# Altium PCB PCB.PcbDoc
Units mm, origin at the board's own origin, x right, y up, seen from the top; angles counter-clockwise.
Board outline 61.5 x 43 mm, 2 copper layers (Top Layer, Bottom Layer); 27 components, 14 nets, 73 pads, 112 vias.
Unrouted connection lines stored in the file: 4.
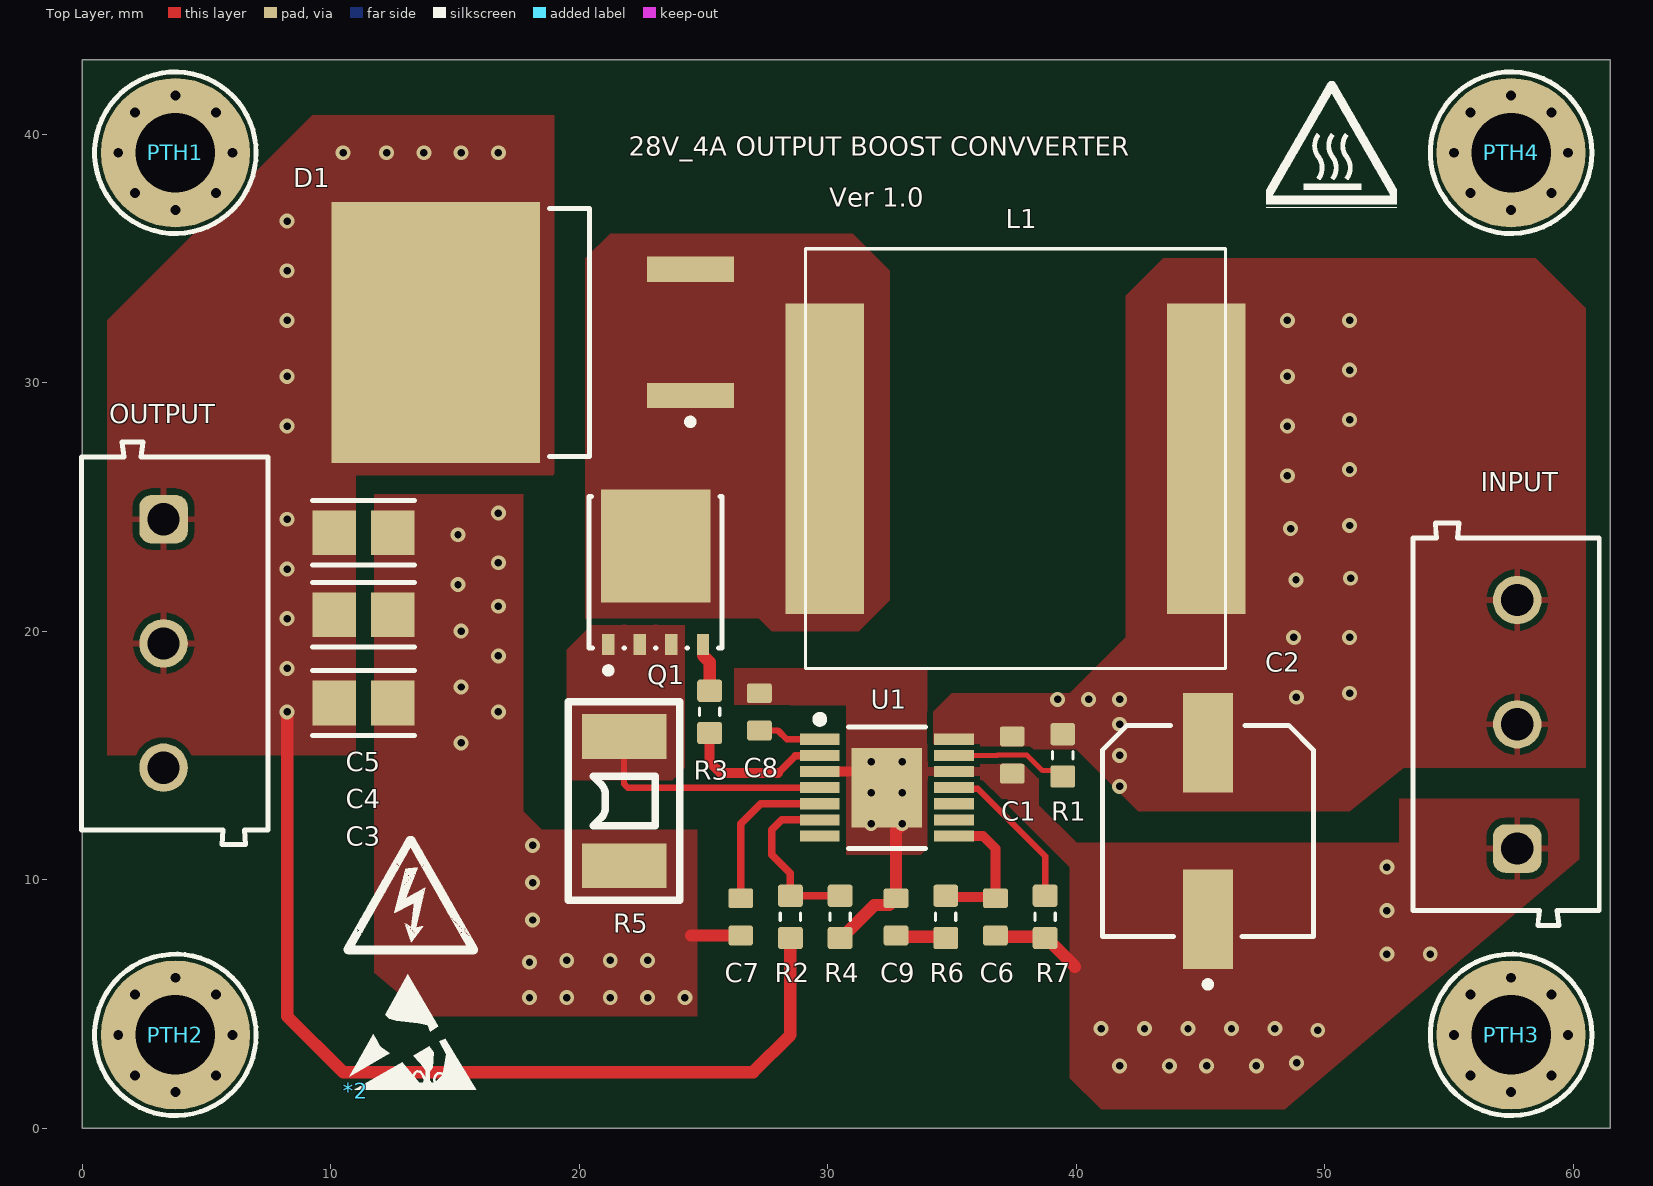
[diagram p0: Top Layer view]
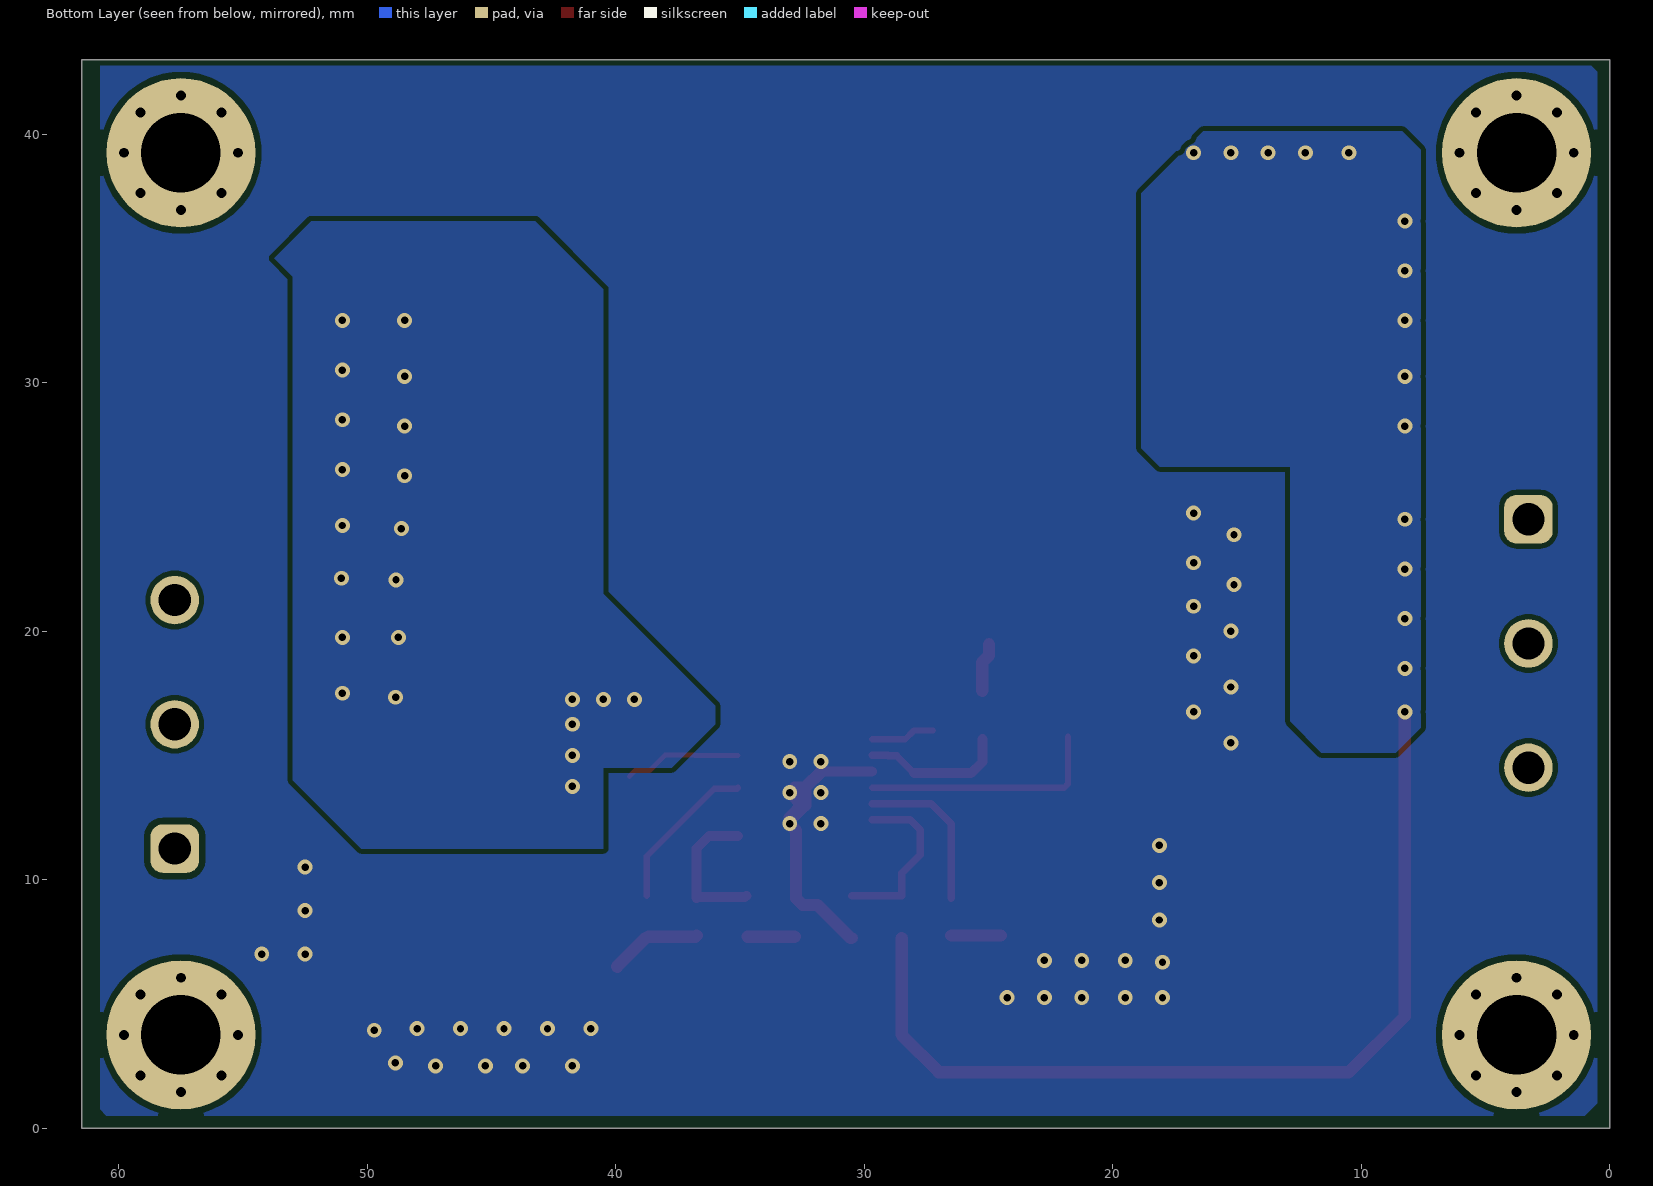
[diagram p1: Bottom Layer view, seen from below]
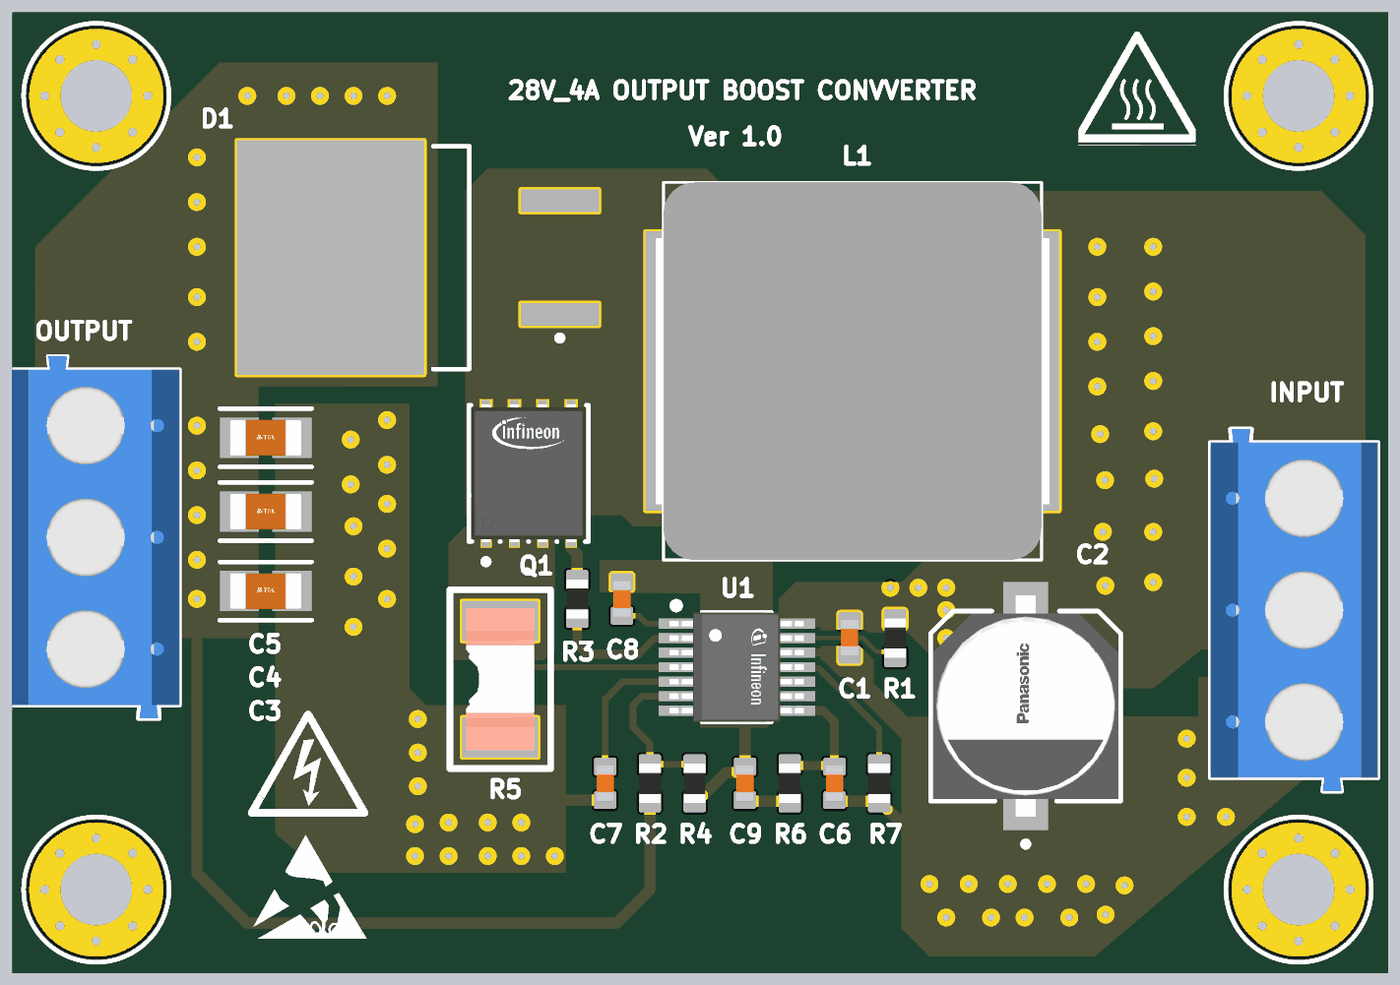
[diagram p2: 3D render of the assembled board from above, using the file's embedded part models]

## Layer stack, top to bottom
Top Solder: solder mask 0.0102, Solder Resist, Dk 3.5
Top Layer: signal copper 0.0356
Dielectric 1: dielectric 0.32, FR-4, Dk 4.8
Bottom Layer: signal copper 0.0356
Bottom Solder: solder mask 0.0102, Solder Resist, Dk 3.5

## Board outline
0,0 0,43 61.5,43 61.5,0

## Design rules (kind name [scope] priority, off if disabled: settings)
Clearance Clearance_1 [All] p1: gap=0.2 ignorepadtopadclearanceinfootprint=FALSE
Clearance [All] p2: gap=0.25 ignorepadtopadclearanceinfootprint=FALSE
PlaneConnect [All] p1: planeconnectstyle=Direct reliefexpansion=0.508 reliefentries=4 reliefconductorwidth=0.254 reliefairgap=0.254
PolygonConnect [All] p1: thpad.connectstyle=Relief thpad.reliefconductorwidth=0.254 thpad.reliefentries=4 thpad.polygonreliefangle="90 Angle" thpad.airgapwidth=0.254 smdpad.connectstyle=Direct smdpad.reliefconductorwidth=0.254 smdpad.reliefentries=4 smdpad.polygonreliefangle="90 Angle" smdpad.airgapwidth=0.254 via.connectstyle=Direct via.reliefconductorwidth=0.254 via.reliefentries=4 via.polygonreliefangle="90 Angle" via.airgapwidth=0.254
RoutingVias [All] p1: holewidth=0.711 width=1.27 viastyle="Through Hole" minholewidth=0.711 minwidth=1.27 maxholewidth=0.711 maxwidth=1.27
SolderMaskExpansion [All] p1: expansion=0.102 istentingtop=FALSE
UnRoutedNet [All] p1: checkbadconnections=TRUE
Width [All] p1: maxlimit=2 minlimit=0.2 preferedwidth=0.5 minimp=50.000000 maximp=50.000000 favimp=50.000000
28 further rules are at their usual default settings.

## Components (designator, comment, footprint, x,y, rotation, side; value= is the part's Value field where it differs from the comment)
*2 "ESD_HAND" ESD_HAND 11,1.5 r0 top (schematic designator *4)
C1 "CC0603KRX7R9BB104" CAP_0603 37.427,15.012 r90 top value=100nF
C2 "EEE-FP1V101AP" FP-FPF-MFG 45.301,11.958 r90 top
C3 "C3216X5R1V226M160AC" FP-C3216-160-0_2-IPC_B 11.326,23.96 r0 top
C4 "C3216X5R1V226M160AC" FP-C3216-160-0_2-IPC_B 11.326,20.658 r0 top
C5 "C3216X5R1V226M160AC" FP-C3216-160-0_2-IPC_B 11.326,17.102 r0 top
C6 "CC0603KRX7R9BB104" CAP_0603 36.75,8.5 r90 top value=100nF
C7 "CC0603KRX7R9BB104" CAP_0603 26.5,8.5 r90 top value=100nF
C8 "CC0603KRX7R9BB104" CAP_0603 27.25,16.75 r270 top value=100nF
C9 "CC0603KRX7R9BB104" CAP_0603 32.75,8.5 r270 top value=100nF
D1 "MBRB2545CTT4G" ONSC-D2PAK-3-418B-04_V 18.123,32.018 r180 top
INPUT "691102710003" 691102710003 57.3,16.25 r90 top
L1 "SRP1770CC-220M" SRP1770TA 37.554,26.938 r180 top value=22uH
OUTPUT "691102710003" 691102710003 3.724,19.504 r270 top
PTH1 "PTH-M2.2" PH3.2 3.75,39.25 r0 top
PTH2 "PTH-M2.2" PH3.2 3.75,3.75 r0 top
PTH3 "PTH-M2.2" PH3.2 57.5,3.75 r0 top
PTH4 "PTH-M2.2" PH3.2 57.5,39.25 r90 top
Q1 "BSC028N06NSTATMA1" FP-PG-TDSON-8-MFG 23.076,22.366 r0 top
R1 "100K" RESC1608N 39.459,15 r90 top
R2 "150K" RESC1608N 28.5,8.5 r270 top value=1%
R3 "8.2R" RESC1608N 25.25,16.75 r270 top
R4 "14.7K" RESC1608N 30.5,8.5 r90 top value=1%
R5 "CMS-R010-1.0" CSS2H-2512 21.806,13.162 r270 top value=12mR
R6 "1M" RESC1608N 34.75,8.5 r90 top
R7 "1M" RESC1608N 38.75,8.5 r90 top
U1 "TLE8386-2EL" SOP65P600X170-15N 32.38,13.7 r0 top

## Footprints (in the part's own frame and the unit in brackets; to place one, negate y for a bottom-side part, rotate by r counter-clockwise, add the part's x,y. Pads: shape width x height; smd on the part's side, far side on the other; paste and mask are expansions set on the pad)
691102710003 [mm] "5,00mm - modular - blue - Horizontal entry with pressure clamp - 9,9 mm height - 03p"
  rrect50% 1.95x1.95 hole 1.3: 1(-5,-0.45)
  round 1.95 hole 1.3: 2(0,-0.45) 3(5,-0.45)
  silkscreen extent -8.1,-3.75 8.1,3.75, body extent -8.1,-3.75 8.1,3.75, height 9.96
CAP_0603 [mm]
  rrect25% 0.8x1 smd: 1(-0.75,0) 2(0.75,0)
  body extent -0.8,-0.4 0.8,0.4, height 0.51
CSS2H-2512 [mm]
  rect 1.8x3.4 smd: 1(-2.6,0) 2(2.6,0)
  silkscreen extent -4,-2.25 4,2.25, body extent -3.17,-1.52 3.18,1.52, height 0.84
ESD_HAND [mm]
  silkscreen extent -0.25,0.04 4.85,4.69
FP-C3216-160-0_2-IPC_B [mm]
  rect 1.754x1.806 smd paste+0 mask+0: 1(-1.176,0) 2(1.176,0)
  silkscreen extent -2.05,-1.3 2.05,1.3, body extent -2.3,-1.15 2.3,1.15, height 0.25
FP-FPF-MFG [mm]
  rect 4x2 smd paste+0 mask+0: 1(-3.55,0) 2(3.55,0)
  silkscreen extent -6.3,-4.25 4.25,4.25, body extent -5.8,-4.5 5.8,4.5, height 0.25
FP-PG-TDSON-8-MFG [mm]
  rect 0.5x0.85 smd paste-1000 mask+0: 1(-1.905,-2.9) 2(-0.635,-2.9) 3(0.635,-2.9) 4(1.905,-2.9)
  rect 4.41x4.55 smd paste-1000 mask-1000: 5-6-7-8(0,1.05)
  silkscreen extent -2.68,-4.07 2.68,3.05, body extent -3,-3.42 3,3.42, height 0.25
ONSC-D2PAK-3-418B-04_V [mm] "DPAK, 3-Leads, Body 9.97x9.145mm, Pitch 2.54mm"
  rect 3.504x1.016 smd: 1(-6.35,2.54) 3(-6.35,-2.54)
  rect 8.38x10.49 smd: 4(3.9,0)
  silkscreen extent -6.48,-4.98 -0.69,4.98, body extent -2.3,-4.98 6.85,4.98, height 4.83
PH3.2 [mm]
  round 6 hole 3.2: 1(0,0)
  silkscreen extent -3.25,-3.25 3.25,3.25
RESC1608N [mm] "Chip Resistor, Body 1.6x0.8mm, 0603, IPC Medium Density"
  round 0.254 on Mech14: 0(0,0)
  rrect25% 0.9x1 smd: 1(-0.85,0) 2(0.85,0)
  silkscreen extent -0.15,-0.41 0.15,0.41, body extent -0.87,-0.47 0.88,0.48, height 0.54
SOP65P600X170-15N [mm] "SOP,0.65mm pitch;14 pin,3.90mm W X 4.90mm L X 1.70mm H body (w/thermal tab)"
  rect 1.6x0.45 smd paste+0 mask+0: 1(-2.7,1.95) 2(-2.7,1.3) 3(-2.7,0.65) 4(-2.7,0) 5(-2.7,-0.65) 6(-2.7,-1.3) 7(-2.7,-1.95) 8(2.7,-1.95) 9(2.7,-1.3) 10(2.7,-0.65) 11(2.7,0) 12(2.7,0.65) 13(2.7,1.3) 14(2.7,1.95)
  rect 2.85x3.2 smd paste-0.555 mask+0: 15(0,0)
  silkscreen extent -2.85,-2.45 1.55,2.9, body extent -3,-2.45 3,2.45, height 1.71
SRP1770TA [mm]
  rect 3.15x12.5 smd: 1(-7.675,0) 2(7.675,0)
  silkscreen extent -8.45,-8.45 8.45,8.45, body extent -8.8,-8.45 8.8,8.45, height 7

## Part data
*2: library part Logo
C1 C6 C7 C8 C9: library part CAP_0603, "0.1 µF ±10% 50V Ceramic Capacitor X7R 0603 (1608 Metric)", LCSC=X7R, manufacturer=YAGEO, Rating=50V, Supplier Part Number 1=1362556, Distributor Link=https://www.digikey.com/en/products/detail/yageo/CC0603KRX7R9BB104/2103082?gclsrc=aw.ds&gad_source=1&gad_campaignid=21513785267&gbraid=0AAAAADrbLljzI6fa-Yv3A_zcN2QMoABTo&gclid=Cj0KCQjw267GBhCSARIsAOjVJ4GgA4ff2FxiLCEbH8-vZcEXf5Wzezs6PVganFd4XNuEUpgWgdMcZi8aAmI2EALw_wcB, Manufacturer Part Number=CC0603KRX7R9BB104, Supplier 1=Farnell
C2: library part CMP-05427-000034-1, "CAP ALUM 100UF 20% 35V SMD", Capacitance=100uF, Case/Package=Radial, Dielectric Material=Aluminium, ESR (Equivalent Series Resistance)=80mR, Leakage Current=35uA, Max Operating Temperature=105°C, Min Operating Temperature=-55°C, Package Quantity=1, Ripple Current=850mA, Tolerance=20%, Voltage=35V, Construction=Cylindrical, Contact Plating=Tin, Diameter=8mm, Height=10.2mm, Height - Seated (Max)=0.402inch, Lead Free="Lead Free", Lead Pitch=3.1mm, Length=10.5mm, Life (Hours)=2000Hour, Material=Aluminium, Mount="Surface Mount", Number of Pins=2, Packaging="Tape and Reel", Radiation Hardening=No, REACH SVHC="No SVHC", Ripple Current (AC)=850mA, RoHS Compliant=Yes, series=FP, Termination=SMD/SMT, Voltage Rating=35V, Voltage Rating (DC)=35V, Width=8.3mm
C3 C4 C5: library part CMP-2000-05398-2, "Multilayer Ceramic Capacitors 22uF ±20% 35V X5R SMD 1206", Capacitance=22uF, Case Code (Metric)=3216, Case Code (Imperial)=1206, Dielectric=X5R, Dielectric Material=Ceramic, Max Operating Temperature=85°C, Min Operating Temperature=-55°C, Package Quantity=2000, Tolerance=20%, Voltage=35V, Case/Package=1206, Construction=Flat, Depth=1.6mm, Height=1.6mm, Lead Free="Lead Free", Length=3.2mm, Mount="Surface Mount", Packaging="Tape and Reel", Radiation Hardening=No, REACH SVHC="No SVHC", Resistor Type=Ceramic, RoHS Compliant=Yes, series=C, Termination=SMD/SMT, Thickness=1.6mm, Voltage Rating=35V, Voltage Rating (DC)=35V, Weight=0.000571oz, Width=0.063inch
D1: library part CMP-1055-00101-1, "SWITCHMODE(TM) Power Rectifier, 3-Pin D2PAK, Pb-Free, Tape and Reel", manufacturer="On Semiconductor", componentlink1description="Manufacturer URL", componentlink1url=http://www.onsemi.com/, componentlink2description=Datasheet, componentlink2url=http://www.onsemi.cn/pub_link/Collateral/MBRB2545CT-D.PDF, ComponentLink3Description="Package Specification", ComponentLink3URL=http://www.onsemi.com/pub_link/Collateral/418B-04.PDF, Configuration="Common Cathode", DatasheetVersion="Rev. 12", Mounting Technology="Surface Mount", PackageDescription="3-Pin Flange Mount, Body 9.145 x 9.97 mm, Pitch 2.54 mm", PackageReference=D2PAK-3-418B-04, PackageVersion="Rev. K, 09/2008", Packing="Tape and Reel", PartNumber=MBRB2545CTT4G, RoHS=TRUE, IFSM Max (A)=150
INPUT OUTPUT: library part CMP-1502-03259-3, "102 Series 5MM Pitch Straight, Pcb Terminal Block, Through Hole, 3 Way", Color=Blue, Current=15A, Max Operating Temperature=105°C, Min Operating Temperature=-40°C, Voltage=300V, Contact Material=Brass, Contact Plating=Tin, Current Rating=15A, Height=13.4mm, Housing Material=Nylon, Lead Pitch=5mm, Length=7.5mm, Mount="Through Hole", Number of Contacts=3, Number of Levels=1, Number of Pins=3, Number of Positions Per Level=3, Packaging=Box, Pitch=5.0038mm, Plating=Steel, RoHS=Compliant, Stripping Length=-6mm, Termination=Screw, Voltage Rating=300V, Width=16.2mm, Wire Gauge (Max)=22AWG, Wire Gauge (Min)=14AWG, Wire/Cable Gauge=22AWG
L1: library part SRP1770TA-1R0M, "1 ÂµH Shielded Drum Core, Wirewound Inductor 52 A 2mOhm Max Nonstandard", Package="NONSTANDARD-2 BOURNS", Availability="In Stock", Check_prices=https://www.snapeda.com/parts/SRP1770TA-1R0M/Bourns/view-part/?ref=eda, MF=Bourns, MP=SRP1770TA-1R0M, PRICE=None, Purchase-URL=https://pricing.snapeda.com/search?q=SRP1770TA-1R0M&ref=eda, SnapEDA_Link=https://www.snapeda.com/parts/SRP1770TA-1R0M/Bourns/view-part/?ref=snap
PTH1 PTH2 PTH3 PTH4: library part PTH_S1
Q1: library part CMP-32901-000649-1, "MOSFET N-CH 60V 24A/100A TDSON", Continuous Drain Current (ID)=100A, Drain to Source Voltage (Vdss)=60V, Max Operating Temperature=175°C, Max Power Dissipation=100W, Min Operating Temperature=-55°C, Input Capacitance=3.375nF, Mount="Surface Mount", Number of Pins=8, Packaging="Tape and Reel", Rds On Max=2.8mR, RoHS Compliant=Yes
R1 R2 R3 R4 R6 R7: library part RES_2A, "0.1W, 1/10W Chip Resistor 0603 (1608 Metric)"
R5: library part CSS2H-2512, "RES.SHUNT (6432) 2512 10m Ohms 1% 2.5W AUTO SMT", manufacturer=ISABELLENHÜTTE, componentlink1description="Product link Vender", componentlink1url=https://www.ozdisan.com/p/hassas-ve-sont-direncler-195/isabellenhutte-cms-r010-1-0-536275, Manufacturer Part Number=CMS-R010-1.0, Rate=4W
U1: "Basic Smart Boost Controller", manufacturer="Infineon Technologies", ManufacturerPartNumber=TLE8386-2EL, PackageReference=PG-SSOP-14-3

## Via types
v1: diameter 0.6, hole 0.3, Top Layer to Bottom Layer, 80 vias
v2: diameter 1, hole 0.4, Top Layer to Bottom Layer, 32 vias

## Nets (pads, with @x,y where several pads share a name; then routed paths per layer and width w, separated by ;. In a path a pad name is that pad's centre, name@x,y a point inside that pad or via, vN(x,y) a via of type N, cw(c..) or ccw(c..) an arc to the next point about the centre after c; other vN are vias at no path point)
FB: R2.1 R4.2 U1.6 | length 7.1
  Top Layer w0.3: U1.6 28.15,12.4 27.75,12 27.75,11 28.5,10.25 R2.1 R4.2
GND: C1.1 C2.1 C3.2 C4.2 C5.2 C6.1 C7.1 C8.1 C9.1 INPUT.1 PTH1.1 PTH2.1 PTH3.1 PTH4.1 R4.1 R5.2 R7.1 U1.3 U1.12 U1.15 | length 18.8
  Top Layer w0.4: U1.3 U1.15@31.73,14.35
  Top Layer w0.5: 24.5,7.75 C7.1 ; R4.1 30.55,7.65 31.877,8.977 32.477,8.977 C9.1 32.75,11.973 32.981,12.204 32.967,12.217 v1(33,12.25) ; U1.15@31.73,14.35 U1.15 ; C6.1 36.8,7.7 38.7,7.7 R7.1 38.8,7.65 39.95,6.5 ; U1.15 32.38,13 33,12.38 v1(33,12.25) ; U1.15 32.8,13.7 v1(33,13.5) 32.5,13 33,12.5 v1(33,12.25)
  other v1: 41.75,2.5 43.75,2.5 45.25,2.5 47.25,2.5 48.873,2.627 49.72,3.936 41,4 42.75,4 44.5,4 46.25,4 48,4 18,5.25 19.5,5.25 21.25,5.25 22.75,5.25 24.25,5.25 18,6.674 19.5,6.75 21.25,6.75 22.75,6.75 52.5,7 54.25,7 18.127,8.373 52.5,8.75 18.127,9.877 52.5,10.5 18.123,11.377 31.75,12.25 31.75,13.5 31.75,14.75 33,14.75 15.25,15.5 16.75,16.75 15.25,17.75 16.75,19 15.25,20 16.75,21 15.123,21.873 16.75,22.75 15.123,23.877 16.75,24.75
  other v2: 3.75,1.45 57.5,1.45 2.124,2.124 5.376,2.124 55.874,2.124 59.126,2.124 1.45,3.75 6.05,3.75 55.2,3.75 59.8,3.75 2.124,5.376 5.376,5.376 55.874,5.376 59.126,5.376 3.75,6.05 57.5,6.05 3.75,36.95 57.5,36.95 2.124,37.624 5.376,37.624 55.874,37.624 59.126,37.624 1.45,39.25 6.05,39.25 55.2,39.25 59.8,39.25 2.124,40.876 5.376,40.876 55.874,40.876 59.126,40.876 3.75,41.55 57.5,41.55
NetC1_2: C1.2 C2.2 INPUT.2 INPUT.3 L1.1 R1.2 U1.14
  other v1: 41.75,13.75 41.75,15 41.75,16.25 39.25,17.25 40.5,17.25 41.75,17.25 48.861,17.339 51,17.5 48.75,19.75 51,19.75 48.847,22.063 51.047,22.127 48.627,24.123 51,24.25 48.5,26.25 51,26.5 48.5,28.25 51,28.504 48.5,30.25 51,30.5 48.5,32.5 51,32.5
NetC3_1: C3.1 C4.1 C5.1 D1.4 OUTPUT.1 OUTPUT.2 R2.2 | length 38
  Top Layer w0.5: v1(8.25,16.75) 8.25,4.5 10.5,2.25 27,2.25 28.5,3.75 R2.2
  other v1: 8.25,18.5 8.25,20.5 8.25,22.496 8.25,24.5 8.25,28.25 8.25,30.25 8.25,32.5 8.25,34.5 8.25,36.5 10.5,39.25 12.25,39.25 13.75,39.25 15.25,39.25 16.75,39.25
NetC6_2: C6.2 R6.2 U1.8 | length 5.9
  Top Layer w0.4: R6.2 34.8,9.3 36.7,9.3 C6.2 36.75,11.25 36.25,11.75 U1.8
NetC7_2: C7.2 U1.5 | length 6.5
  Top Layer w0.3: C7.2 26.5,12.25 27.3,13.05 U1.5
NetC8_2: C8.2 U1.1 | length 2.6
  Top Layer w0.254: C8.2 28,16 28.35,15.65 U1.1
NetC9_2: C9.2 R6.1 | length 2
  Top Layer w0.254: C9.2 C9.2@32.8,7.7 ; R6.1@34.7,7.7 R6.1
  Top Layer w0.5: C9.2@32.8,7.7 R6.1@34.7,7.7
NetD1_1: D1.1 D1.3 L1.2 Q1.5-6-7-8
NetQ1_1: Q1.1 Q1.2 Q1.3 R5.1 U1.4 | length 9.8
  Top Layer w0.254: R5.1 21.806,13.849 21.955,13.7 U1.4
NetQ1_4: Q1.4 R3.1 | length 2
  Top Layer w0.5: Q1.4 24.981,19.019 25.25,18.75 R3.1
NetR1_1: R1.1 U1.13 | length 4.7
  Top Layer w0.2: U1.13 36.829,15 36.841,15.012 38.013,15.012 38.638,14.388 39.221,14.388 R1.1
NetR3_2: R3.2 U1.2 | length 5.8
  Top Layer w0.3: 28,14.281 28.694,14.975 29.03,14.975 29.055,15 U1.2
  Top Layer w0.4: R3.2@25.25,15.65 25.25,14.734 25.703,14.281 28,14.281
NetR7_2: R7.2 U1.11 | length 6.4
  Top Layer w0.254: U1.11 35.124,13.656 36.038,13.656 38.75,10.944 R7.2
pads on no net: OUTPUT.3 R1.0 R2.0 R3.0 R4.0 R6.0 R7.0 U1.7 U1.9 U1.10

## Polygon pours and split planes (outlines as drawn)
NetC1_2 on Top Layer "NONET_L01_P-001" (solid, pour order 3): 34.25,15.25 36.25,15.25 40,15.25 42.5,12.75 51,12.75 53.187,14.5 60.5,14.5 60.5,33 58.5,35 43.5,35 42,33.5 42,19.75 39.75,17.5 35,17.5 34.25,16.75
GND on Top Layer "NONET_L01_P-001" (solid, pour order 9): 30.75,16.5 30.75,16.992 26.25,17.042 26.25,18.5 34,18.5 34,16.25 34,14.75 38.25,14.75 38.5,14.5 38.5,13 40.016,11.484 53,11.5 53,13 53,13.25 60.25,13.25 60.25,12.513 60.25,10.818 48.384,0.75 41,0.75 39.75,2 39.75,10.5 37.25,13 37.25,13.25 37,13.25 36.25,14 34,14 34,11.25 33.75,11 30.75,11 30.75,11.75
GND on Top Layer "NONET_L01_P-001" (solid, pour order 7): 17.75,15.477 17.75,12.75 18.5,12 24.75,12 24.75,11.47 24.75,4.5 13.847,4.5 11.75,6.256 11.75,25.5 17.75,25.5
NetC3_1 on Top Layer "NONET_L01_P-001" (solid, pour order 0): 1,32.5 1,15 11,15 11,26.263 19,26.243 19,40.75 9.25,40.75
NetQ1_1 on Top Layer "NONET_L01_P-001" (solid, pour order 5): 19.5,19.25 20.5,20.25 24.25,20.25 24.25,14.5 23.75,14 19.5,14
NetD1_1 on Top Layer "NONET_L01_P-001" (solid, pour order 1): 20.25,20.5 27.25,20.5 27.75,20 31.25,20 32.5,21.25 32.5,34.5 31,36 21.25,36 20.25,35
GND on Bottom Layer "NONET_L01_P-001" (solid, pour order 10): 0.5,1 0.5,42.5 0.75,42.75 60.75,42.75 60.75,0.75 60.5,0.5 1,0.5
NetC3_1 on Bottom Layer "NONET_L01_P-001" (solid, pour order 6): 18.858,27.362 18.858,37.612 16.358,40.112 8.358,40.112 7.608,39.362 7.608,16.112 8.608,15.112 11.608,15.112 12.858,16.362 12.858,26.612 18.108,26.612 18.608,27.112
NetC1_2 on Bottom Layer "NONET_L01_P-001" (solid, pour order 4): 40.5,33.75 43.25,36.5 52.25,36.5 53.75,35 53,34.25 53,14 50.25,11.25 40.5,11.25 40.5,14 40.5,14.5 37.75,14.5 36,16.25 36,17 40.5,21.5 40.5,23

## Silkscreen, mask and mechanical layers (free items; w line width, h text height)
Top Overlay:
  drawing of 8 lines, arcs and shapes, not listed
  text "28V_4A OUTPUT BOOST CONVVERTER" at 22.004,39.131 h0.76
  text "Ver 1.0" at 30.071,37.074 h0.76
Mechanical 1:
  the board outline again, w0.254